# Altium PCB A3000_8MB.pcbdoc (part 3 of 3)
Units mil, origin at the board's own origin, x right, y up, seen from the top; angles counter-clockwise.
Board outline 6950 x 3881 mil, 4 copper layers (TopLayer, GND, VCC, BottomLayer), stack 70.897 mil thick; 83 components, 216 nets, 829 pads, 490 vias.
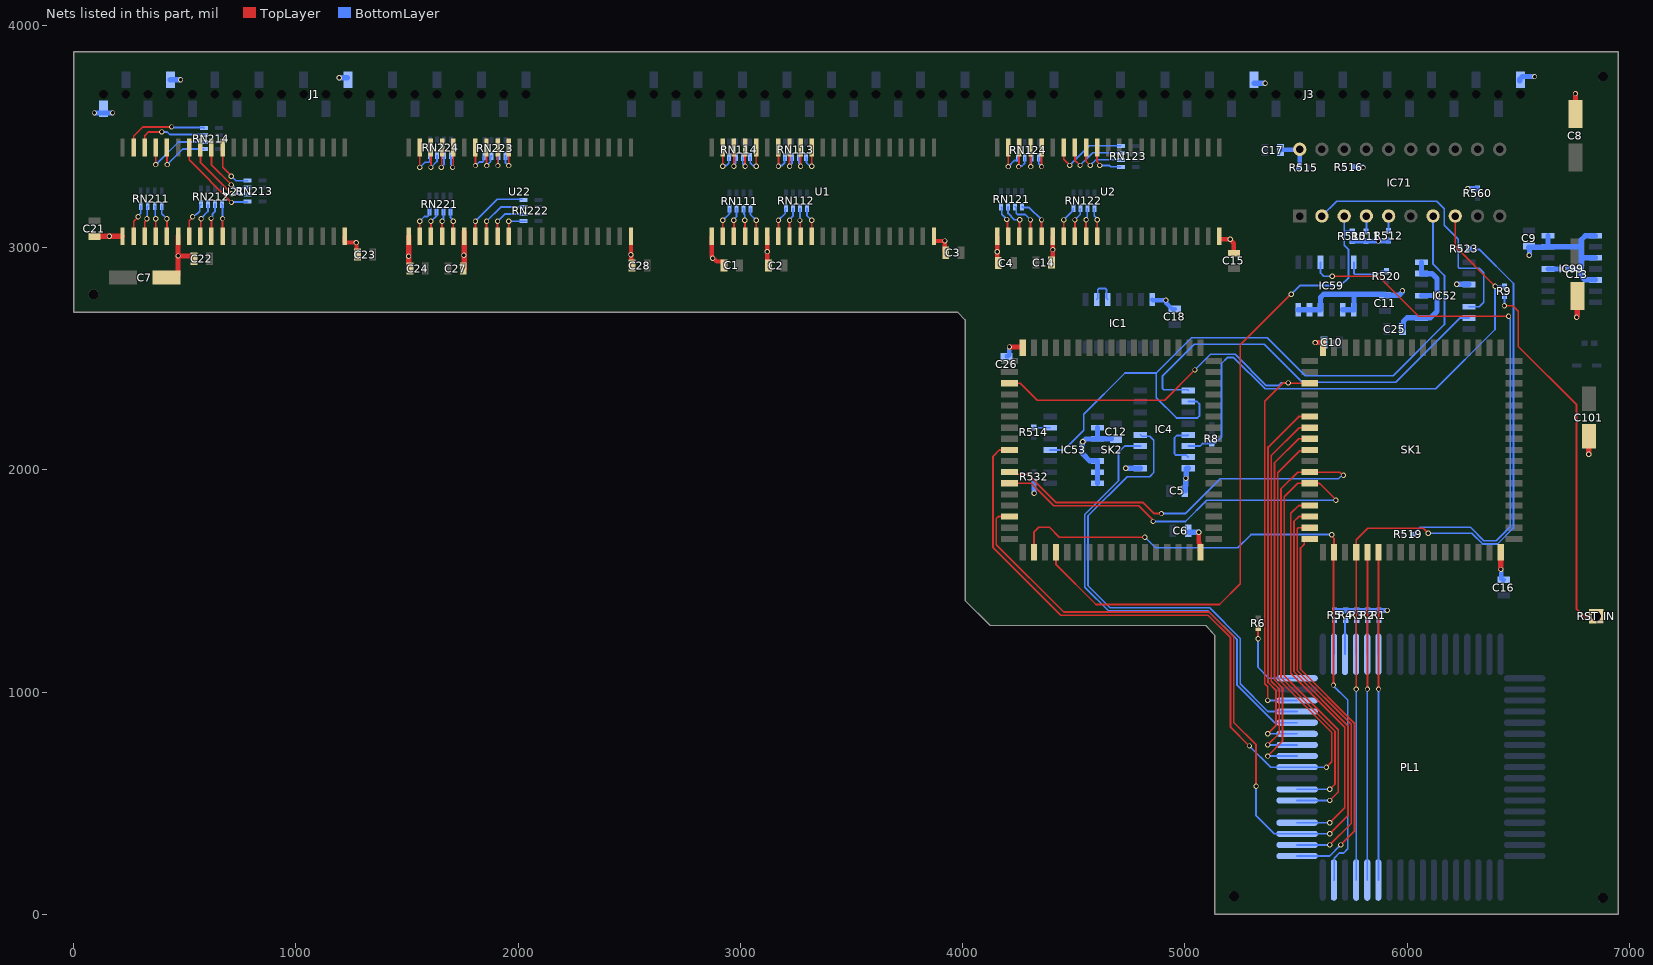
[diagram p5: the nets of this part, all layers, seen from the top]

## Via types
v1: diameter 23.62, hole 15.75, TopLayer to BottomLayer, tented both sides, 490 vias

## Nets (pads, with @x,y where several pads share a name; then routed paths per layer and width w, separated by ;. In a path a pad name is that pad's centre, name@x,y a point inside that pad or via, vN(x,y) a via of type N, cw(c..) or ccw(c..) an arc to the next point about the centre after c; other vN are vias at no path point) (continued)
NetIC1_9: IC1.9 IC1.10 | length 136.7
  BottomLayer w7.87: IC1.9@4602.58,2766.77 4608.14,2772.33 4608.14,2811.38 4612.76,2816 4642.75,2816 4647.36,2811.38 4647.36,2771.99 IC1.10@4652.58,2766.77
NetIC4_13: IC4.13 IC4.15 | length 206.9
  BottomLayer w7.87: IC4.15@5014.35,2057.8 5004.52,2067.62 4957.45,2067.62 4952.83,2072.24 4952.83,2144.66 4963.18,2155.01 5011.56,2155.01 IC4.13@5014.35,2157.8
NetIC53_6: IC53.6 R514.2 | length 74.3
  BottomLayer w7.87: R514.2@4320.31,2193.23 4323.54,2190 IC53.6@4393.23,2190
NetIC59_3: IC59.3 R519.2 | length 2425.5
  TopLayer w7.87: v1(5663.05,2871.15) 5870.62,2871.15 6050.91,2690.85 v1(6455.85,2690.85)
  BottomLayer w7.87: IC59.3@5610,2934.42 5610,2886.42 5625.27,2871.15 v1(5663.05,2871.15) ; R519.2@6026.61,1710 6058.46,1741.85 6284.78,1741.85 6345.11,1681.52 6389.24,1681.52 6400.22,1681.52 6463.72,1745.02 6463.72,2678.72 6455.85,2686.59 v1(6455.85,2690.85)
NetIC59_6: IC59.6 R520.2 | length 204.5
  BottomLayer w7.87: IC59.6@5760,2934.42 5760,2884.62 5764.61,2880.01 5868.68,2880.01 5882.46,2893.79 R520.2@5907.06,2893.79
NetIC71_4: IC71.4 R511.1 | length 70
  BottomLayer w7.87: R511.1@5814.97,3072.76 5816.23,3074.02 IC71.4@5816.23,3142.28
NetIC71_5: IC71.5 R512.1 | length 67.5
  BottomLayer w7.87: R512.1@5915.96,3074.89 5916.23,3075.16 IC71.5@5916.23,3142.28
NetPL1_38: PL1.38 R1.2 | length 154.9
  BottomLayer w7.87: PL1.38@5870.16,1170.67 5870.16,1321.71 R1.2@5872.89,1324.45
NetPL1_39: PL1.39 R2.2 | length 154.9
  BottomLayer w7.87: PL1.39@5820.16,1170.67 5820.16,1321.71 R2.2@5822.89,1324.45
NetPL1_40: PL1.40 R3.2 | length 154.9
  BottomLayer w7.87: PL1.40@5770.16,1170.67 5770.16,1321.71 R3.2@5772.89,1324.45
NetPL1_41: PL1.41 R4.2 | length 154.9
  BottomLayer w7.87: PL1.41@5720.16,1170.67 5720.16,1321.71 R4.2@5722.89,1324.45
NetPL1_42: PL1.42 R5.2 | length 154.9
  BottomLayer w7.87: PL1.42@5670.16,1170.67 5670.16,1321.71 R5.2@5672.89,1324.45
NetPL1_44: PL1.44 R6.1 | length 373
  TopLayer w7.87: v1(5328.78,1240) 5328.78,1287.12 R6.1@5330,1288.35
  BottomLayer w7.87: v1(5328.78,1240) 5328.78,1111.82 5377.8,1062.8 PL1.44@5504.41,1062.8
NetR9_1: R9.1 RST_IN.1 | length 1682.9
  TopLayer w7.87: v1(6437.45,2738.62) 6474.25,2738.62 6499.38,2713.49 6499.38,2555.43 6761.97,2292.84 6761.97,1804.74 ; 6761.98,1804.72 6761.98,1575.28 6761.97,1373.98 6794.84,1341.1 RST_IN.1@6850,1341.1
  BottomLayer w7.87: v1(6437.45,2738.62) R9.1@6437.45,2782.57 ; RST_IN.1@6838.19,1341.1 RST_IN.1@6850,1352.91
NetRN111_1: RN111.1 U1.5 | length 135.6
  TopLayer w7.87: U1.5@3070.84,3051.1 v1(3070.84,3123.2)
  BottomLayer w7.87: RN111.1@3045.24,3176.09 3045.24,3148.79 v1(3070.84,3123.2)
NetRN111_2: RN111.2 U1.4 | length 126.9
  TopLayer w7.87: v1(3019.61,3123.2) 3020.22,3122.58 3020.22,3051.72 U1.4@3020.84,3051.1
  BottomLayer w7.87: RN111.2@3013.75,3176.09 3016.29,3162.31 3016.29,3151.17 cw(c2997.18,3132.06) 3019.61,3147.14 v1(3019.61,3123.2)
NetRN111_3: RN111.3 U1.3 | length 130.1
  TopLayer w7.87: v1(2970.39,3123.2) 2970.84,3122.75 U1.3@2970.84,3051.1
  BottomLayer w7.87: v1(2970.39,3123.2) 2970.39,3127.46 2982.25,3139.32 RN111.3@2982.25,3176.09
NetRN111_4: RN111.4 U1.2 | length 137.4
  TopLayer w7.87: U1.2@2920.84,3051.1 v1(2920.84,3123.2)
  BottomLayer w7.87: v1(2920.84,3123.2) 2950.76,3153.12 RN111.4@2950.76,3176.09
NetRN112_1: RN112.1 U1.10 | length 135.2
  TopLayer w7.87: U1.10@3320.84,3051.1 v1(3320.84,3123.2)
  BottomLayer w7.87: RN112.1@3299.24,3177.4 3299.24,3144.79 v1(3320.84,3123.2)
NetRN112_2: RN112.2 U1.9 | length 127.6
  TopLayer w7.87: v1(3267.75,3122.58) 3269.29,3121.04 3269.29,3052.65 U1.9@3270.84,3051.1
  BottomLayer w7.87: v1(3267.75,3122.58) RN112.2@3267.75,3177.4
NetRN112_3: RN112.3 U1.8 | length 132.7
  TopLayer w7.87: U1.8@3220.84,3051.1 v1(3220.84,3123.2)
  BottomLayer w7.87: v1(3220.84,3123.2) 3220.84,3125.78 3236.25,3141.19 RN112.3@3236.25,3177.4
NetRN112_4: RN112.4 U1.7 | length 140.3
  TopLayer w7.87: U1.7@3170.84,3051.1 v1(3170.84,3123.2)
  BottomLayer w7.87: v1(3170.84,3123.2) 3201.13,3153.49 3201.13,3173.78 RN112.4@3204.76,3177.4
NetRN113_1: RN113.1 U1.33 | length 140
  TopLayer w7.87: v1(3320.84,3366.74) U1.33@3320.84,3451.1
  BottomLayer w7.87: RN113.1@3295.1,3407.09 3297.48,3404.7 3297.48,3382.17 3309.9,3369.75 3317.82,3369.75 v1(3320.84,3366.74)
NetRN113_2: RN113.2 U1.34 | length 128.4
  TopLayer w7.87: v1(3270.84,3366.38) U1.34@3270.84,3451.1
  BottomLayer w7.87: RN113.2@3263.6,3407.09 3263.6,3377.88 3270.84,3370.64 v1(3270.84,3366.38)
NetRN113_3: RN113.3 U1.35 | length 129.7
  TopLayer w7.87: v1(3220.84,3366.59) U1.35@3220.84,3451.1
  BottomLayer w7.87: v1(3220.84,3366.59) 3220.84,3367.64 3232.11,3378.91 RN113.3@3232.11,3407.09
NetRN113_4: RN113.4 U1.36 | length 144.5
  TopLayer w7.87: v1(3170.84,3366.64) U1.36@3170.84,3451.1
  BottomLayer w7.87: v1(3170.84,3366.64) 3173.49,3369.29 3185.85,3369.29 3198.73,3382.17 3198.73,3405.21 RN113.4@3200.61,3407.09
NetRN114_1: RN114.1 U1.38 | length 143.5
  TopLayer w7.87: v1(3070.84,3366.64) U1.38@3070.84,3451.1
  BottomLayer w7.87: RN114.1@3042.24,3407.09 3043.75,3405.58 3043.75,3382.17 3056.27,3369.65 3067.82,3369.65 v1(3070.84,3366.64)
NetRN114_2: RN114.2 U1.39 | length 129.1
  TopLayer w7.87: v1(3020.84,3366.64) U1.39@3020.84,3451.1
  BottomLayer w7.87: RN114.2@3010.75,3407.09 3010.75,3376.68 3020.78,3366.64 v1(3020.84,3366.64)
NetRN114_3: RN114.3 U1.40 | length 128.4
  TopLayer w7.87: v1(2970.84,3366.64) U1.40@2970.84,3451.1
  BottomLayer w7.87: v1(2970.84,3366.64) 2970.84,3370.06 2979.25,3378.47 RN114.3@2979.25,3407.09
NetRN114_4: RN114.4 U1.41 | length 144.2
  TopLayer w7.87: v1(2920.84,3366.64) U1.41@2920.84,3451.1
  BottomLayer w7.87: v1(2920.84,3366.64) 2923.8,3369.6 2937.7,3369.6 2947.76,3379.65 RN114.4@2947.76,3407.09
NetRN121_1: RN121.1 U2.5 | length 186.1
  TopLayer w7.87: U2.5@4355,3051.1 v1(4355,3124.97)
  BottomLayer w7.87: RN121.1@4267.24,3184.12 4271.21,3180.16 4299.81,3180.16 v1(4355,3124.97)
NetRN121_2: RN121.2 U2.4 | length 181.8
  TopLayer w7.87: U2.4@4305,3051.1 v1(4305,3124.97)
  BottomLayer w7.87: RN121.2@4235.75,3184.12 4240.67,3179.2 4240.67,3155.02 4246.21,3149.47 4280.5,3149.47 v1(4305,3124.97)
NetRN121_3: RN121.3 U2.3 | length 169.4
  TopLayer w7.87: U2.3@4255,3051.1 4255.81,3051.91 4255.81,3124.97 v1(4256.61,3125.78)
  BottomLayer w7.87: RN121.3@4204.25,3184.12 4204.25,3154.16 4232.63,3125.78 v1(4256.61,3125.78)
NetRN121_4: RN121.4 U2.2 | length 142.3
  TopLayer w7.87: v1(4198.62,3127.03) 4201.63,3124.02 4201.63,3054.47 U2.2@4205,3051.1
  BottomLayer w7.87: RN121.4@4175,3180.99 4175.32,3180.67 4175.32,3150.33 v1(4198.62,3127.03)
NetRN122_1: RN122.1 U2.10 | length 131.6
  TopLayer w7.87: U2.10@4605,3051.1 v1(4605,3125.79)
  BottomLayer w7.87: RN122.1@4592.24,3177.4 4592.24,3142.8 4605,3130.05 v1(4605,3125.79)
NetRN122_2: RN122.2 U2.9 | length 128.7
  TopLayer w7.87: U2.9@4555,3051.1 v1(4555,3125.78)
  BottomLayer w7.87: v1(4555,3125.78) 4560.75,3131.53 RN122.2@4560.75,3177.4
NetRN122_3: RN122.3 U2.8 | length 136.3
  TopLayer w7.87: U2.8@4505,3051.1 v1(4505,3124.97)
  BottomLayer w7.87: v1(4505,3124.97) 4529.25,3149.22 RN122.3@4529.25,3177.4
NetRN122_4: RN122.4 U2.7 | length 144
  TopLayer w7.87: U2.7@4455,3051.1 v1(4455,3124.97)
  BottomLayer w7.87: v1(4455,3124.97) 4455,3125.79 4497.76,3168.54 RN122.4@4497.76,3177.4
NetRN123_1: RN123.1 U2.33 | length 183.9
  TopLayer w7.87: U2.33@4605,3451.1 4604.34,3450.44 4604.34,3386.65 4616.57,3374.42 v1(4616.57,3370.16)
  BottomLayer w7.87: v1(4616.57,3370.16) 4660.11,3370.16 4666.41,3363.86 RN123.1@4711.54,3363.86
NetRN123_2: RN123.2 U2.34 | length 236.6
  TopLayer w7.87: U2.34@4555,3451.1 4555,3389.49 v1(4574.33,3370.16)
  BottomLayer w7.87: v1(4574.33,3370.16) 4599.53,3395.36 RN123.2@4711.54,3395.36
NetRN123_3: RN123.3 U2.35 | length 297.5
  TopLayer w7.87: U2.35@4505,3451.1 4505,3393.13 v1(4527.98,3370.16)
  BottomLayer w7.87: v1(4527.98,3370.16) 4584.67,3426.85 RN123.3@4711.54,3426.85
NetRN123_4: RN123.4 U2.36 | length 358.2
  TopLayer w7.87: U2.36@4455,3451.1 4455,3397.17 v1(4482.01,3370.16)
  BottomLayer w7.87: v1(4482.01,3370.16) 4570.2,3458.35 RN123.4@4711.54,3458.35
NetRN124_1: RN124.1 U2.38 | length 132.3
  TopLayer w7.87: v1(4355,3364.63) U2.38@4355,3451.1
  BottomLayer w7.87: RN124.1@4342.24,3405.2 4342.24,3377.38 v1(4355,3364.63)
NetRN124_2: RN124.2 U2.39 | length 129.4
  TopLayer w7.87: U2.39@4305,3451.1 4305,3366.16 v1(4306.53,3364.63)
  BottomLayer w7.87: v1(4306.53,3364.63) 4308.64,3366.74 4308.64,3403.09 RN124.2@4310.75,3405.2
NetRN124_3: RN124.3 U2.40 | length 147.4
  TopLayer w7.87: v1(4251.5,3364.63) 4253.25,3366.38 4253.25,3449.35 U2.40@4255,3451.1
  BottomLayer w7.87: v1(4251.5,3364.63) 4254.04,3367.17 4266.61,3367.17 4279.25,3379.81 RN124.3@4279.25,3405.2
NetRN124_4: RN124.4 U2.41 | length 150.6
  TopLayer w7.87: v1(4205,3364.63) U2.41@4205,3451.1
  BottomLayer w7.87: v1(4205,3364.63) 4232.9,3392.52 4242.83,3392.52 4247.76,3397.45 RN124.4@4247.76,3405.2
NetRN211_1: RN211.1 U21.5 | length 145.7
  TopLayer w7.87: U21.5@420,3051.1 v1(420,3130)
  BottomLayer w7.87: RN211.1@396.63,3187.09 396.63,3153.37 v1(420,3130)
NetRN211_2: RN211.2 U21.4 | length 138
  TopLayer w7.87: U21.4@370,3051.1 v1(370,3130)
  BottomLayer w7.87: RN211.2@365.14,3187.09 367.57,3184.66 367.57,3132.43 v1(370,3130)
NetRN211_3: RN211.3 U21.3 | length 141.6
  TopLayer w7.87: U21.3@320,3051.1 320,3115.74 330,3125.74 v1(330,3130)
  BottomLayer w7.87: v1(330,3130) 331.82,3131.82 331.82,3185.27 RN211.3@333.64,3187.09
NetRN211_4: RN211.4 U21.2 | length 149.3
  TopLayer w7.87: U21.2@270,3051.1 271,3052.1 271,3118.89 290,3137.89 v1(290,3138.86)
  BottomLayer w7.87: v1(290,3138.86) 290,3143.12 302.14,3155.26 RN211.4@302.14,3187.09
NetRN212_1: RN212.1 U21.10 | length 148.3
  TopLayer w7.87: U21.10@670,3051.1 v1(670,3130.63)
  BottomLayer w7.87: RN212.1@665.58,3197.61 670,3193.19 v1(670,3130.63)
NetRN212_2: RN212.2 U21.9 | length 152.5
  TopLayer w7.87: v1(618.59,3131.54) 620,3130.13 U21.9@620,3051.1
  BottomLayer w7.87: v1(618.59,3131.54) 618.59,3135.8 624.56,3141.77 624.56,3150.55 635.75,3161.74 RN212.2@635.75,3195.95
NetRN212_3: RN212.3 U21.8 | length 155.5
  TopLayer w7.87: U21.8@570,3051.1 571.72,3052.82 571.72,3128.6 v1(573.43,3130.31)
  BottomLayer w7.87: v1(573.43,3130.31) 573.43,3132.06 604.25,3162.88 RN212.3@604.25,3192.46
NetRN212_4: RN212.4 U21.7 | length 170.1
  TopLayer w7.87: U21.7@520,3051.1 520,3120.45 535,3135.45 v1(535,3138.86)
  BottomLayer w7.87: v1(535,3138.86) 539.26,3138.86 553.44,3153.03 556.67,3153.03 567.83,3164.19 567.83,3190.06 RN212.4@572.75,3194.98
NetRN213_1: RN213.1 U21.36 | length 399.5
  TopLayer w7.87: U21.36@520,3451.1 520,3394.92 709.93,3204.99 v1(709.93,3203.69)
  BottomLayer w7.87: v1(709.93,3203.69) 712.1,3205.86 781.12,3205.86 RN213.1@782.03,3206.77
NetRN213_2: RN213.2 U21.35 | length 340.7
  TopLayer w7.87: U21.35@570,3451.1 570.45,3450.65 570.45,3383.91 711.22,3243.14 v1(711.22,3243.03)
  BottomLayer w7.87: v1(711.22,3243.03) 712.83,3244.65 735.25,3244.65 738.72,3241.18 779.12,3241.18 RN213.2@782.03,3238.27
NetRN213_3: RN213.3 U21.34 | length 286.9
  TopLayer w7.87: U21.34@620,3451.1 620,3373.62 709.36,3284.25 v1(709.36,3282.36)
  BottomLayer w7.87: v1(709.36,3282.36) 713.63,3282.36 726.22,3269.76 RN213.3@785.31,3269.76
NetRN213_4: RN213.4 U21.33 | length 227.2
  TopLayer w7.87: U21.33@670,3451.1 670.61,3450.49 670.61,3361.39 708.65,3323.35 v1(708.65,3321.72)
  BottomLayer w7.87: v1(708.65,3321.72) 710.28,3321.72 730.74,3301.26 RN213.4@782.03,3301.26
NetRN214_1: RN214.1 U21.38 | length 270.8
  TopLayer w7.87: U21.38@420,3451.1 420.57,3450.53 420.57,3374.58 v1(421.14,3374.01)
  BottomLayer w7.87: v1(421.14,3374.01) 490.99,3443.86 RN214.1@585.4,3443.86
NetRN214_2: RN214.2 U21.39 | length 342.5
  TopLayer w7.87: v1(370,3373.62) U21.39@370,3451.1
  BottomLayer w7.87: v1(370,3373.62) 471.74,3475.35 RN214.2@592.92,3475.35
NetRN214_3: RN214.3 U21.40 | length 336.2
  TopLayer w7.87: U21.40@320,3451.1 320,3504.09 336.46,3520.55 v1(396.63,3520.55)
  BottomLayer w7.87: v1(396.63,3520.55) 420.65,3520.55 432.12,3509.09 RN214.3@591.63,3509.09
NetRN214_4: RN214.4 U21.41 | length 386.5
  TopLayer w7.87: U21.41@270,3451.1 270,3502.24 310.75,3542.99 v1(440.92,3542.99)
  BottomLayer w7.87: v1(440.92,3542.99) 443.24,3540.67 584.21,3540.67 RN214.4@586.53,3538.35
NetRN221_1: RN221.1 U22.5 | length 131.4
  TopLayer w7.87: U22.5@1707.64,3051.1 v1(1707.64,3118.94)
  BottomLayer w7.87: RN221.1@1696.08,3177.72 1696.08,3134.75 1707.64,3123.2 v1(1707.64,3118.94)
NetRN221_2: RN221.2 U22.4 | length 129.5
  TopLayer w7.87: U22.4@1657.64,3051.1 v1(1657.64,3118.94)
  BottomLayer w7.87: v1(1657.64,3118.94) 1664.59,3125.89 RN221.2@1664.59,3177.72
NetRN221_3: RN221.3 U22.3 | length 137.2
  TopLayer w7.87: U22.3@1607.64,3051.1 v1(1607.64,3118.94)
  BottomLayer w7.87: v1(1607.64,3118.94) 1633.09,3144.39 RN221.3@1633.09,3177.72
NetRN221_4: RN221.4 U22.2 | length 153.2
  TopLayer w7.87: U22.2@1557.64,3051.1 v1(1557.64,3118.94)
  BottomLayer w7.87: v1(1557.64,3118.94) 1578.7,3140 1593.03,3140 1601.21,3148.19 1601.21,3177.34 RN221.4@1601.59,3177.72
NetRN222_1: RN222.1 U22.10 | length 144.9
  TopLayer w7.87: U22.10@1957.64,3051.1 v1(1957.64,3118.94)
  BottomLayer w7.87: v1@1958.09,3118.94 RN222.1@2035.16,3118.94
NetRN222_2: RN222.2 U22.9 | length 196.8
  TopLayer w7.87: U22.9@1907.64,3051.1 v1(1907.64,3118.94)
  BottomLayer w7.87: v1(1907.64,3118.94) 1939.86,3151.16 RN222.2@2023.28,3151.16
NetRN222_3: RN222.3 U22.8 | length 257.5
  TopLayer w7.87: U22.8@1857.64,3051.1 1857.8,3051.26 v1(1857.8,3118.94)
  BottomLayer w7.87: v1(1857.8,3118.94) 1921.52,3182.66 RN222.3@2020.95,3182.66
NetRN222_4: RN222.4 U22.7 | length 318.5
  TopLayer w7.87: U22.7@1807.64,3051.1 v1(1807.64,3118.94)
  BottomLayer w7.87: v1(1807.64,3118.94) 1906.28,3217.58 RN222.4@2017.46,3217.58
NetRN223_1: RN223.1 U22.33 | length 132.4
  TopLayer w7.87: v1(1957.64,3369.61) U22.33@1957.64,3451.1
  BottomLayer w7.87: RN223.1@1943.43,3412.83 1943.43,3380.8 1954.61,3369.61 v1(1957.64,3369.61)
NetRN223_2: RN223.2 U22.34 | length 126.5
  TopLayer w7.87: U22.34@1907.64,3451.1 1908.24,3450.5 1908.24,3370.21 v1(1908.84,3369.61)
  BottomLayer w7.87: v1(1908.84,3369.61) 1910.38,3371.16 1910.38,3411.29 RN223.2@1911.93,3412.83
NetRN223_3: RN223.3 U22.35 | length 134.2
  TopLayer w7.87: U22.35@1857.64,3451.1 1857.64,3370.87 v1(1858.9,3369.61)
  BottomLayer w7.87: v1(1858.9,3369.61) 1858.9,3369.79 1875.51,3386.4 1875.51,3407.91 RN223.3@1880.43,3412.83
NetRN223_4: RN223.4 U22.36 | length 151.1
  TopLayer w7.87: v1(1807.64,3369.61) U22.36@1807.64,3451.1
  BottomLayer w7.87: v1(1807.64,3369.61) 1809,3369.61 1825.02,3385.63 1839.4,3385.63 1844.02,3390.24 1844.02,3407.91 RN223.4@1848.94,3412.83
NetRN224_1: RN224.1 U22.38 | length 144.7
  TopLayer w7.87: v1@1704.94,3363.06 1707.64,3365.76 U22.38@1707.64,3451.1
  BottomLayer w7.87: RN224.1@1697.99,3415.71 1697.99,3374.27 1704.94,3367.32 v1@1704.94,3363.06
  other v1: 1704.94,3361.13
NetRN224_2: RN224.2 U22.39 | length 151.4
  TopLayer w7.87: v1(1653.78,3361.13) 1655.71,3363.06 1655.71,3449.18 U22.39@1657.64,3451.1
  BottomLayer w7.87: v1(1653.78,3361.13) 1666.5,3373.9 RN224.2@1666.5,3415.71
NetRN224_3: RN224.3 U22.40 | length 156.6
  TopLayer w7.87: v1(1607.64,3360.78) U22.40@1607.64,3451.1
  BottomLayer w7.87: v1(1607.64,3360.78) 1635,3388.14 RN224.3@1635,3415.71
NetRN224_4: RN224.4 U22.41 | length 174.9
  TopLayer w7.87: v1(1557.64,3360.78) U22.41@1557.64,3451.1
  BottomLayer w7.87: v1(1557.64,3360.78) 1580.72,3383.86 1598.89,3383.86 1603.5,3388.47 RN224.4@1603.5,3415.71
nHSYC: PL1.46 SK1.46 SK2.46 | length 3152.9
  TopLayer w7.87: SK2.46@4210.47,2390 4259.44,2390 4335.82,2313.62 4908.78,2313.62 v1@5044.85,2449.69 ; v1(5372.22,962.8) 5372.22,1024.56 5359.38,1037.4 5359.38,2309.08 5441.79,2391.5 v1(5465.23,2391.5) ; v1@5466.73,2390 SK1.46@5561,2390
  BottomLayer w7.87: v1(5045,2449.84) 5115.16,2520 5225.97,2520 5366.44,2379.53 5421.56,2379.53 5433.53,2391.5 v1(5465.23,2391.5) ; v1(5372.22,962.8) PL1.46@5504.41,962.8
nIOGT: PL1.58 SK1.58 SK2.58 | length 4252.3
  TopLayer w7.87: SK2.58@4210.47,1790 4160,1790 4151.49,1781.49 4151.49,1663.34 4454.22,1360.62 5109.6,1360.62 5220,1250.22 5220,863.66 5320.16,763.5 v1(5320.16,576.57) ; SK1.58@5561,1790 5511.59,1790 5490.48,1768.89 5490.48,1091.7 5733.25,848.94 5733.25,444.8 v1(5651.24,362.8)
  BottomLayer w7.87: v1(5320.16,576.57) 5320.16,444.41 5401.78,362.8 v1(5651.24,362.8)
nIORQ: PL1.59 SK1.59 | length 1767.8
  TopLayer w7.87: SK1.59@5561,1740 5509.66,1740 5505.05,1735.39 5505.05,1097.74 5747.81,854.97 5747.81,409.37 v1(5651.24,312.8)
  BottomLayer w7.87: PL1.59@5504.41,312.8 v1(5651.24,312.8)
nMREQ: PL1.55 SK1.55 SK2.55 | length 3503
  TopLayer w7.87: SK2.55@4210.47,1940 4308.09,1940 4409.62,1838.47 4792.07,1838.47 4856.53,1774.01 v1(4856.53,1768.19) ; v1(5651.24,512.8) 5689.55,551.1 5689.55,830.83 5446.78,1073.6 5446.78,1879.54 5507.24,1940 SK1.55@5561,1940 5561.92,1939.08 5605.8,1939.08 5679.29,1865.58 v1(5679.29,1864.02)
  BottomLayer w7.87: v1(4856.53,1768.19) 5002.32,1768.19 5098.15,1864.02 v1(5679.29,1864.02) ; PL1.55@5504.41,512.8 v1(5651.24,512.8)
nREF1: IC4.9 IC52.6 | length 1804.3
  BottomLayer w7.87: IC4.9@5014.35,2357.8 5011.79,2360.35 4904.1,2360.35 4899.49,2364.97 4899.49,2423.74 5041.25,2565.51 5357.32,2565.51 5528.49,2394.33 5948.42,2394.33 6238.03,2683.94 IC52.6@6277.61,2683.94
nRMCS: PL1.60 SK1.60 | length 1746
  TopLayer w7.87: SK1.60@5561,1690 5547.02,1690 5537.18,1680.16 5537.18,1665.85 5519.61,1648.28 5519.61,1103.77 5762.38,861 5762.38,373.94 v1(5701.24,312.8)
  BottomLayer w7.87: PL1.60@5504.41,262.8 5651.24,262.8 v1(5701.24,312.8)
nRW: PL1.62 SK1.62 SK2.62 | length 3124.2
  TopLayer w7.87: SK2.62@4320.31,1630.16 4320.31,1719.31 4342.81,1741.81 4390.45,1741.81 4434.97,1697.28 v1(4820,1697.28) ; v1(5660.41,1708.18) 5660.41,1701.79 5670.84,1691.36 SK1.62@5670.84,1630.16 5668,1627.32 v1(5668,1032)
  BottomLayer w7.87: v1(4820,1697.28) 4867.52,1649.77 5237.97,1649.77 5297.21,1709.01 5659.59,1709.01 v1(5660.41,1708.18) ; v1(5668,1032) 5668,1029.71 5732.73,964.97 5732.73,295.45 5713.86,276.57 5694.94,276.57 5671.8,253.44 5671.8,156.57 PL1.62@5670.16,154.92
nSDAK: PL1.49 SK1.49 | length 1695.9
  TopLayer w7.87: v1(5372.22,812.8) 5409.18,849.76 5409.18,1008.2 5373.94,1043.43 5373.94,2102.64 5511.3,2240 SK1.49@5561,2240
  BottomLayer w7.87: v1(5372.22,812.8) PL1.49@5504.41,812.8
nSDRQ: IC4.4 PL1.47 | length 2201.1
  BottomLayer w7.87: IC4.4@4799.78,2157.8 4806.5,2151.08 4842.03,2151.08 4859.76,2133.35 4859.76,1988.22 4841.27,1969.72 4740.07,1969.72 4563.9,1793.55 4563.9,1478.7 4662.83,1379.76 5111.06,1379.76 5249.13,1241.69 5249.13,1037.45 5373.79,912.8 PL1.47@5504.41,912.8
nSIRQ: PL1.57 SK1.57 | length 1766.6
  TopLayer w7.87: SK1.57@5561,1840 5511.59,1840 5475.91,1804.32 5475.91,1085.67 5718.68,842.9 5718.68,480.36 v1@5651.24,412.92
  BottomLayer w7.87: PL1.57@5504.41,412.8 v1(5651.12,412.8) v1@5651.24,412.92
nVDAK: PL1.50 SK1.50 | length 1694.5
  TopLayer w7.87: v1(5372.22,762.8) 5423.75,814.32 5423.75,1014.23 5388.51,1049.47 5388.51,2064.85 5513.66,2190 SK1.50@5561,2190
  BottomLayer w7.87: v1(5372.22,762.8) PL1.50@5504.41,762.8
nVDRQ: IC4.3 PL1.48 | length 2107.8
  BottomLayer w7.87: IC4.3@4799.78,2107.8 4728.78,2107.8 4700.84,2079.86 4700.84,1951.1 4549.33,1799.58 4549.33,1472.67 4656.8,1365.2 5105.02,1365.2 5234.57,1235.65 5234.57,1031.41 5403.19,862.8 PL1.48@5504.41,862.8
nVIDW: PL1.51 SK1.51 | length 1695.9
  TopLayer w7.87: v1(5372.22,712.8) 5438.31,778.89 5438.31,1020.26 5403.08,1055.5 5403.08,2031.78 5511.3,2140 SK1.51@5561,2140
  BottomLayer w7.87: v1(5372.22,712.8) PL1.51@5504.41,712.8
phi1: PL1.66 SK1.66 | length 1475.4
  TopLayer w7.87: v1(5870.84,1014.17) SK1.66@5870.84,1630.16
  BottomLayer w7.87: PL1.66@5870.16,154.92 5870.5,155.26 v1@5870.5,1013.82 ; v1@5870.84,1013.82 v1(5870.84,1014.17)
phi2: PL1.65 SK1.65 | length 1475.9
  TopLayer w7.87: v1(5820.84,1014.17) SK1.65@5820.84,1630.16
  BottomLayer w7.87: PL1.65@5820.16,154.92 5820.5,155.26 5820.5,1013.82 v1(5820.84,1014.17) v1@5820.84,1013.82
RCLK: PL1.64 R523.2 SK1.64 | length 3684.7
  TopLayer w7.87: v1(5770.16,1014.17) SK1.64@5770.16,1629.47 ; SK1.64@5770.84,1630.16 SK1.64@5770.16,1629.47 ; v1(6094.07,1715.47) 6071.97,1737.58 5822.14,1737.58 5770.16,1685.59 SK1.64@5770.16,1629.47
  BottomLayer w7.87: PL1.64@5770.16,154.92 v1(5770.16,1014.17) ; v1(6094.07,1715.47) 6290.56,1715.47 6339.07,1666.96 6406.25,1666.96 6478.29,1738.99 6478.29,2838.81 6325.67,2991.43 6282.84,2991.43 R523.2@6278.72,2995.55
REF1: IC52.5 IC71.2 R523.1 | length 1217.5
  BottomLayer w7.87: IC71.2@5616.23,3142.28 5682.75,3208.8 6133.05,3208.8 6166.79,3175.05 6166.79,3101.24 6230.08,3037.95 6230.08,3000.88 R523.1@6235.41,2995.55 6230.08,2990.22 6230.08,2911.98 6234.69,2907.37 6323.79,2907.37 6344.02,2887.14 6344.02,2754.6 6323.37,2733.94 IC52.5@6277.61,2733.94
REF2: IC71.3 R510.1 SK2.64 | length 3007.8
  TopLayer w7.87: SK2.64@4420.31,1630.16 4420.31,1573.78 4599.76,1394.33 5155.56,1394.33 5248.62,1487.39 5248.62,2563.25 5475.64,2790.28 v1(5478.01,2790.28)
  BottomLayer w7.87: v1(5478.01,2790.28) 5517.96,2830.2 5701.7,2830.2 5736.16,2864.66 5736.16,2991.17 5716.23,3011.1 5716.23,3072.76 ; IC71.3@5716.23,3142.28 5716.23,3072.76 ; R510.1@5752.39,3072.76 5716.23,3072.76
RES: IC4.14 IC71.8 R8.2 R9.2 | length 2535.7
  TopLayer w7.87: IC71.8@6216.23,3142.28 6216.23,3005.65 v1(6395.02,2826.86)
  BottomLayer w7.87: IC4.14@5014.35,2107.8 5068.43,2107.8 5079.39,2118.76 R8.2@5120,2118.76 5122.79,2121.55 5139.01,2121.55 5164.16,2146.7 5164.16,2478.56 5191.03,2505.43 5219.94,2505.43 5360.41,2364.97 6127.98,2364.97 6395.02,2632.01 v1(6395.02,2826.86) 6436.46,2826.86 R9.2@6437.45,2825.87
SEQ: PL1.54 SK1.54 SK2.54 | length 3578.4
  TopLayer w7.87: SK2.54@4210.47,1990 4220.31,1980.16 4293.19,1980.16 4420.3,1853.04 4812.8,1853.04 4862.3,1803.54 v1(4893.93,1803.54) ; v1(5651.24,562.8) 5674.98,586.54 5674.98,824.8 5432.21,1067.57 5432.21,1914.98 5507.24,1990 SK1.54@5561,1990 5696.63,1990 5710.41,1976.22 v1(5713.05,1976.22)
  BottomLayer w7.87: v1(4893.93,1803.54) 5001.83,1803.54 5158.86,1960.57 5691,1960.57 5706.66,1976.22 v1(5713.05,1976.22) ; PL1.54@5504.41,562.8 v1(5651.24,562.8)
SPMD: PL1.52 SK1.52 SK2.52 | length 4261.7
  TopLayer w7.87: SK2.52@4210.47,2090 4210.4,2089.93 4165.67,2089.93 4136.92,2061.19 4136.92,1649.77 4440.64,1346.05 5103.57,1346.05 5205.43,1244.19 5205.43,842.57 v1(5290,758) ; SK1.52@5561,2090 5557.17,2086.17 5516.2,2086.17 5417.64,1987.61 5417.64,1061.54 5660.41,818.77 5660.41,686.54 v1(5636.67,662.8)
  BottomLayer w7.87: v1(5290,758) 5385.2,662.8 v1(5636.67,662.8)
SResetn: IC4.10 IC53.4 IC71.7 | length 3157.8
  BottomLayer w7.87: IC53.4@4393.23,2090 4456.22,2090 4545,2178.78 4545,2250.57 4730.33,2435.9 4870.45,2435.9 ; IC4.10@5014.35,2307.8 5054.37,2307.8 5065,2297.17 5065,2242.48 5055.91,2233.39 4962.29,2233.39 4870.35,2325.33 4870.35,2435.8 4870.45,2435.9 ; IC71.7@6116.23,3142.28 6116.23,2925.62 6167.6,2874.26 6167.6,2654.71 5936.35,2423.46 5540.56,2423.46 5369.38,2594.64 5029.19,2594.64 4870.45,2435.9
VCC: C1.1 C2.1 C3.1 C4.1 C5.1 C6.1 C7.1 C8.1 C9.1 C10.1 C11.1 C12.1 C13.1 C14.1 C15.1 C16.1 C17.1 C18.1 C21.1 C22.1 C23.1 C24.1 C25.1 C26.1 C27.1 C28.1 C101.1 IC1.14 IC4.1 IC4.16 IC52.3 IC52.9 IC52.11 IC52.13 IC52.14 IC53.9 IC53.10 IC53.12 IC53.13 IC53.14 IC59.9 IC59.10 IC59.12 IC59.13 IC59.14 IC71.20 IC99.1 IC99.3 IC99.5 IC99.11 IC99.13 IC99.14 J1.1 J1.4 J1.12 J3.8 J3.20 R1.1 R2.1 R3.1 R4.1 R5.1 R510.2 R511.2 R512.2 R515.2 R516.2 R532.2 R560.2 SK1.9 SK1.43 SK2.9 SK2.43 U1.1 U1.6 U1.21 U2.1 U2.6 U2.21 U21.1 U21.6 U21.21 U22.1 U22.6 U22.21 | length 6318.3
  TopLayer w19.68: U21.21@1220,3051.1 1220,3023.31 1220.16,3023.15 v1(1272.1,3023.15) 1272.85,3022.4 1272.85,2969.94 C23.1@1272.1,2969.19 ; C28.1@2507.31,2920.01 2508.39,2921.08 2508.39,2966.86 v1(2507.64,2967.61) ; v1@2507.31,2967.61 2507.31,2974.68 2507.64,2975 U22.21@2507.64,3051.1 ; U1.1@2870.84,3051.1 2870.84,2960.11 2874.93,2956.03 v1(2874.93,2952.83) 2878.12,2952.83 2893.43,2937.52 2920.68,2937.52 2921.47,2936.74 C1.1@2921.47,2920.01 ; U1.6@3120.84,3051.1 v1(3120.84,2982.18) 3121.15,2981.86 3121.15,2919.68 C2.1@3121.47,2919.37 ; U1.21@3870.84,3051.1 3870.84,3030.16 3871,3030 v1(3920,3030) C3.1@3920,2981.76 ; U2.1@4155,3051.1 v1(4155,2981.76) 4155.32,2981.45 4155.32,2930.55 C4.1@4155.63,2930.24 ; C14.1@4402.58,2932.99 4404.94,2935.35 4404.94,2962.58 4405,2962.64 U2.6@4405,3051.1 ; v1(5061.5,1719.31) 5061.5,1672.95 5066.37,1668.07 5066.37,1634.1 SK2.9@5070.31,1630.16 ; U2.21@5155,3039.09 5156.81,3037.28 v1(5203.66,3037.28) 5203.66,3036.14 5220,3019.8 C15.1@5220,2979.84
  TopLayer w23.62: C21.1@93.53,3051.73 93.84,3051.42 160.85,3051.42 v1(161.16,3051.1) U21.1@220,3051.1 ; C7.1@440.92,2855.51 450.31,2855.51 470,2875.2 v1@470,2960.47 ; U21.6@470,3051.1 v1(470,2962.6) 524.75,2962.6 ; U22.1@1507.64,3051.1 1507.64,2995.36 1508.27,2994.73 ; C24.1@1508.27,2905.63 1508.27,2994.73 ; U22.1@1508.27,3016.5 1508.27,2994.73 ; C27.1@1757.01,2905.32 1757.32,2905.63 U22.6@1757.32,3050.79 ; U22.6@1757.32,3072.25 U22.6@1757.32,3050.79 ; U22.6@1757.64,3051.1 U22.6@1757.32,3050.79 ; v1(4210.14,2553.23) 4268.34,2553.23 4270.31,2551.26 SK2.43@4270.31,2549.84 ; v1(5586.23,2573.23) 5618.87,2573.23 SK1.43@5618.87,2575.63 ; SK1.9@6420.84,1630.16 6421.13,1629.87 6421.13,1552.49 v1(6421.42,1552.2) ; C8.1@6756.87,3601.84 v1(6756.87,3693.37) ; v1(6762.09,2686.73) 6765.41,2690.05 C13.1@6765.41,2781.58 ; v1(6817,2070) C101.1@6817,2150.67
  BottomLayer w19.68: C26.1@4197.13,2510.87 4203.88,2510.87 4209.39,2516.38 4209.39,2552.48 v1(4210.14,2553.23) ; IC1.14@4852.58,2766.77 4855.24,2764.11 v1(4914.29,2764.11) 4916.55,2761.85 4916.55,2749.53 4941.93,2724.15 C18.1@4953.94,2724.15 ; C17.1@5429.65,3439 5431.28,3440.64 5514.6,3440.64 IC71.20@5516.23,3442.28 5516.23,3360.31 5514.27,3358.35 R515.2@5512.87,3358.35 ; v1(6421.42,1552.2) 6423.68,1549.94 6423.68,1511.1 6429.19,1505.59 C16.1@6434.62,1505.59
  BottomLayer w23.62: v1(93.84,3606) v1(175,3606) ; J1.4@435,3754.96 v1(481.42,3754.96) ; v1(1195.56,3764.41) J1.12@1232.59,3764.41 ; v1(4321.16,1894.93) R532.2@4321.16,1948.07 ; IC53.14@4606.77,1940 IC53.13@4606.77,1990 IC53.12@4606.77,2040 4605.79,2040.98 4570.65,2040.98 4538.28,2073.35 4538.28,2125.7 v1(4539.79,2127.2) 4541.92,2127.2 4553.73,2139.02 4605.79,2139.02 IC53.10@4606.77,2140 ; IC53.9@4606.77,2190 IC53.10@4606.77,2140 ; C12.1@4669.04,2140 IC53.10@4606.77,2140 ; v1(4734.09,2007.8) IC4.1@4799.78,2007.8 ; C5.1@5002.95,1905.92 5002.95,1930.55 5003.01,1930.61 5003.01,1960.34 v1(5004.52,1961.85) 5006.02,1963.36 5006.02,2005.83 5007.99,2007.8 IC4.16@5014.35,2007.8 ; C6.1@5018.19,1719.31 v1(5061.5,1719.31) ; J3.8@5311.45,3739.21 v1(5360.35,3739.21) ; IC59.14@5510,2720.87 IC59.13@5560,2720.87 IC59.12@5610,2720.87 5610,2776.43 5623.84,2790.26 C11.1@5900,2790.26 ; v1(5586.23,2573.23) 5615.3,2573.23 5615.52,2573.45 C10.1@5620.63,2573.45 ; R5.1@5672.89,1367.76 R4.1@5722.89,1367.76 R3.1@5772.89,1367.76 R2.1@5822.89,1367.76 R1.1@5872.89,1367.76 v1(5910.41,1367.76) ; IC59.10@5710,2720.87 IC59.9@5760,2720.87 5760,2776.43 ; R510.2@5752.39,3029.45 R511.2@5814.97,3029.45 v1(5870.62,3029.45) 5913.83,3029.45 5913.99,3029.61 5915.96,3029.61 R512.2@5915.96,3031.58 ; R516.2@5759.54,3361.33 R516.2@5761.51,3361.33 ; R516.2@5762.35,3360.49 R516.2@5761.51,3361.33 ; v1(5801.35,3360.55) 5800.57,3361.33 R516.2@5761.51,3361.33 ; C11.1@5903.54,2785.54 5962.8,2785.54 5978.67,2801.41 v1(5978.67,2806.8) ; C25.1@5983.39,2633.94 5983.79,2634.34 5983.79,2669.18 5999.53,2684.93 6063.09,2684.93 IC52.9@6064.07,2683.94 6065.05,2684.93 6104.93,2684.93 6133.49,2713.49 6133.49,2784.01 v1@6134.21,2784.73 ; IC52.11@6064.07,2783.94 6064.86,2784.73 v1@6134.21,2784.73 ; IC52.14@6064.07,2933.94 IC52.13@6064.07,2883.94 6065.05,2882.96 6111.14,2882.96 6133.49,2860.61 6133.49,2787.03 v1(6135,2785.52) v1@6134.21,2784.73 ; v1(6222.61,2834.93) 6276.63,2834.93 IC52.3@6277.61,2833.94 ; v1(6272.77,3265.88) R560.2@6316.23,3265.88 ; J3.20@6506.21,3751.17 6506.21,3757.94 6518.27,3770 v1(6572.86,3770) ; C9.1@6547,3002.06 C9.1@6549.61,3002.06 ; v1@6550,2966.03 6550,3001.66 C9.1@6549.61,3002.06 ; IC99.11@6633.23,2904.22 v1(6703.39,2904.22) 6782.93,2904.22 6783.13,2904.42 ; IC99.14@6633.23,3054.22 IC99.13@6633.23,3004.22 ; IC99.5@6846.77,2854.22 6845.79,2855.2 6799.07,2855.2 6783.13,2871.15 6783.13,2904.42 ; IC99.3@6846.77,2954.22 6783.95,2954.22 6783.13,2953.4 ; IC99.1@6846.77,3054.22 6845.79,3053.24 6800.71,3053.24 6783.13,3035.66 6783.13,3002.63 ; C9.1@6549.61,3002.06 6613.84,3002.06 6616,3004.22 IC99.13@6633.23,3004.22 ; IC99.13@6633.23,3004.22 6781.54,3004.22 6783.13,3002.63 ; 6783.13,2904.42 6783.13,2953.4 ; 6783.13,2953.4 6783.13,3002.63
  other v1: 1507.22,2961.29 6548.25,2965.64 1756.27,2966.22 4405.83,2991.22
pads on no net: IC52.4 IC52.8 IC52.10 IC52.12 IC53.8 IC53.11 IC59.8 IC59.11 IC71.12 IC71.13 IC71.14 IC71.15 IC71.16 IC71.17 IC99.2 IC99.4 IC99.6 IC99.10 IC99.12 J1.5 J1.7 J1.8 J1.9 J1.10 J1.11 J1.13 J1.14 J1.16 J1.21 J1.22 J1.23 J1.24 J1.25 J1.26 J1.27 J1.28 J1.29 J1.30 J1.31 J1.32 J1.33 J1.34 J1.35 J1.36 J1.37 J1.38 J1.39 J1.40 J2.13 J2.14 J2.20 J2.21 J2.22 J2.23 J2.24 J2.25 J2.26 J2.27 J2.28 J2.29 J2.30 J2.31 J2.32 J2.33 J2.34 J2.35 J2.36 J2.37 J2.38 J2.39 J2.40 J3.4 J3.6 J3.7 J3.9 J3.10 J3.21 J3.22 J3.23 J3.24 J3.25 J3.26 J3.27 J3.28 J3.29 J3.30 J3.31 J3.32 J3.33 J3.34 J3.35 J3.36 J3.37 J3.38 J3.39 J3.40 PL1.9 PL1.28 PL1.29 PL1.30 PL1.31 PL1.32 PL1.33 PL1.34 PL1.35 PL1.36 PL1.37 PL1.43 SK2.49 SK2.50 SK2.51 SK2.57 SK2.59 SK2.60 SK2.65 SK2.66 U1.11 U1.12 U1.15 U1.16 U1.32 U2.11 U2.12 U2.15 U2.16 U2.32 U21.11 U21.12 U21.15 U21.16 U21.32 U22.11 U22.12 U22.15 U22.16 U22.32

## Polygon pours and split planes (outlines as drawn)
GND on TopLayer "NONET_L-01_P-001" (solid, remove dead copper, pour order 0): 0,0 6950,0 6950,3881 0,3881
GND on GND "NONET_L-01_P-001" (solid, pour order 1): 0,0 6950,0 6950,3881 0,3881
VCC on VCC "NONET_L-01_P-001" (solid, pour order 2): 0,0 6950,0 6950,3881 0,3881
GND on BottomLayer "NONET_L-01_P-001" (solid, remove dead copper, pour order 3): 0,-10.97 6950,-10.97 6950,3881 0,3881

## Keep-outs
KeepOutLayer:
  lines w10: 0,2710 3977.25,2710 4011.36,2675.89 4011.36,1410.26 4121.62,1300 5091.8,1300 5136.06,1255.74 5136.06,0 6950,0 6950,2422.66 6950,3882 0,3882 0,2710

## Silkscreen, mask and mechanical layers (free items; w line width, h text height)
TopOverlay:
  lines w10: 5117.26,1547.38 5184.15,1614.27 ; 6480.68,1547.36 6547.57,1614.25
  text "8MB" at 1265.56,3522.36 h47.24
  text "4MB" at 3949.08,3511.6 h47.24
  text "Master MEMC" at 5719.03,2748.62 h60
  text "Slave MEMC" at 4395,2742.7 h60
  text "A3000 8MB RAM" at 5670.84,848.04 h60
  text "(C) Ian Jeffray, 2025" at 5424.68,676.57 h60
BottomOverlay:
  lines w10: 6506.92,93.92 6587,174
  text "ACT174" at 4884.19,2054.02 h49.21 r270
  text "." at 6015,26 h60
Board Outline:
  lines w10: 3890,2710 3977.25,2710 ; 3890,2710 3977.25,2710 ; 3890,2710 0,2710 0,3882 6950,3882 6950,2724 6950,0 5136.06,0 5136.06,78 5136.06,1255.74 5091.8,1300 4121.62,1300 4067.51,1354.1 4010,1411.62 4010,2677.25 3977.25,2710